# Altium PCB 遥控器.PcbDoc (part 1 of 2)
Units mil, origin at the board's own origin, x right, y up, seen from the top; angles counter-clockwise.
Board outline 3238.38 x 2687.2 mil, 2 copper layers (Top Layer, Bottom Layer); 70 components, 52 nets, 262 pads, 78 vias.
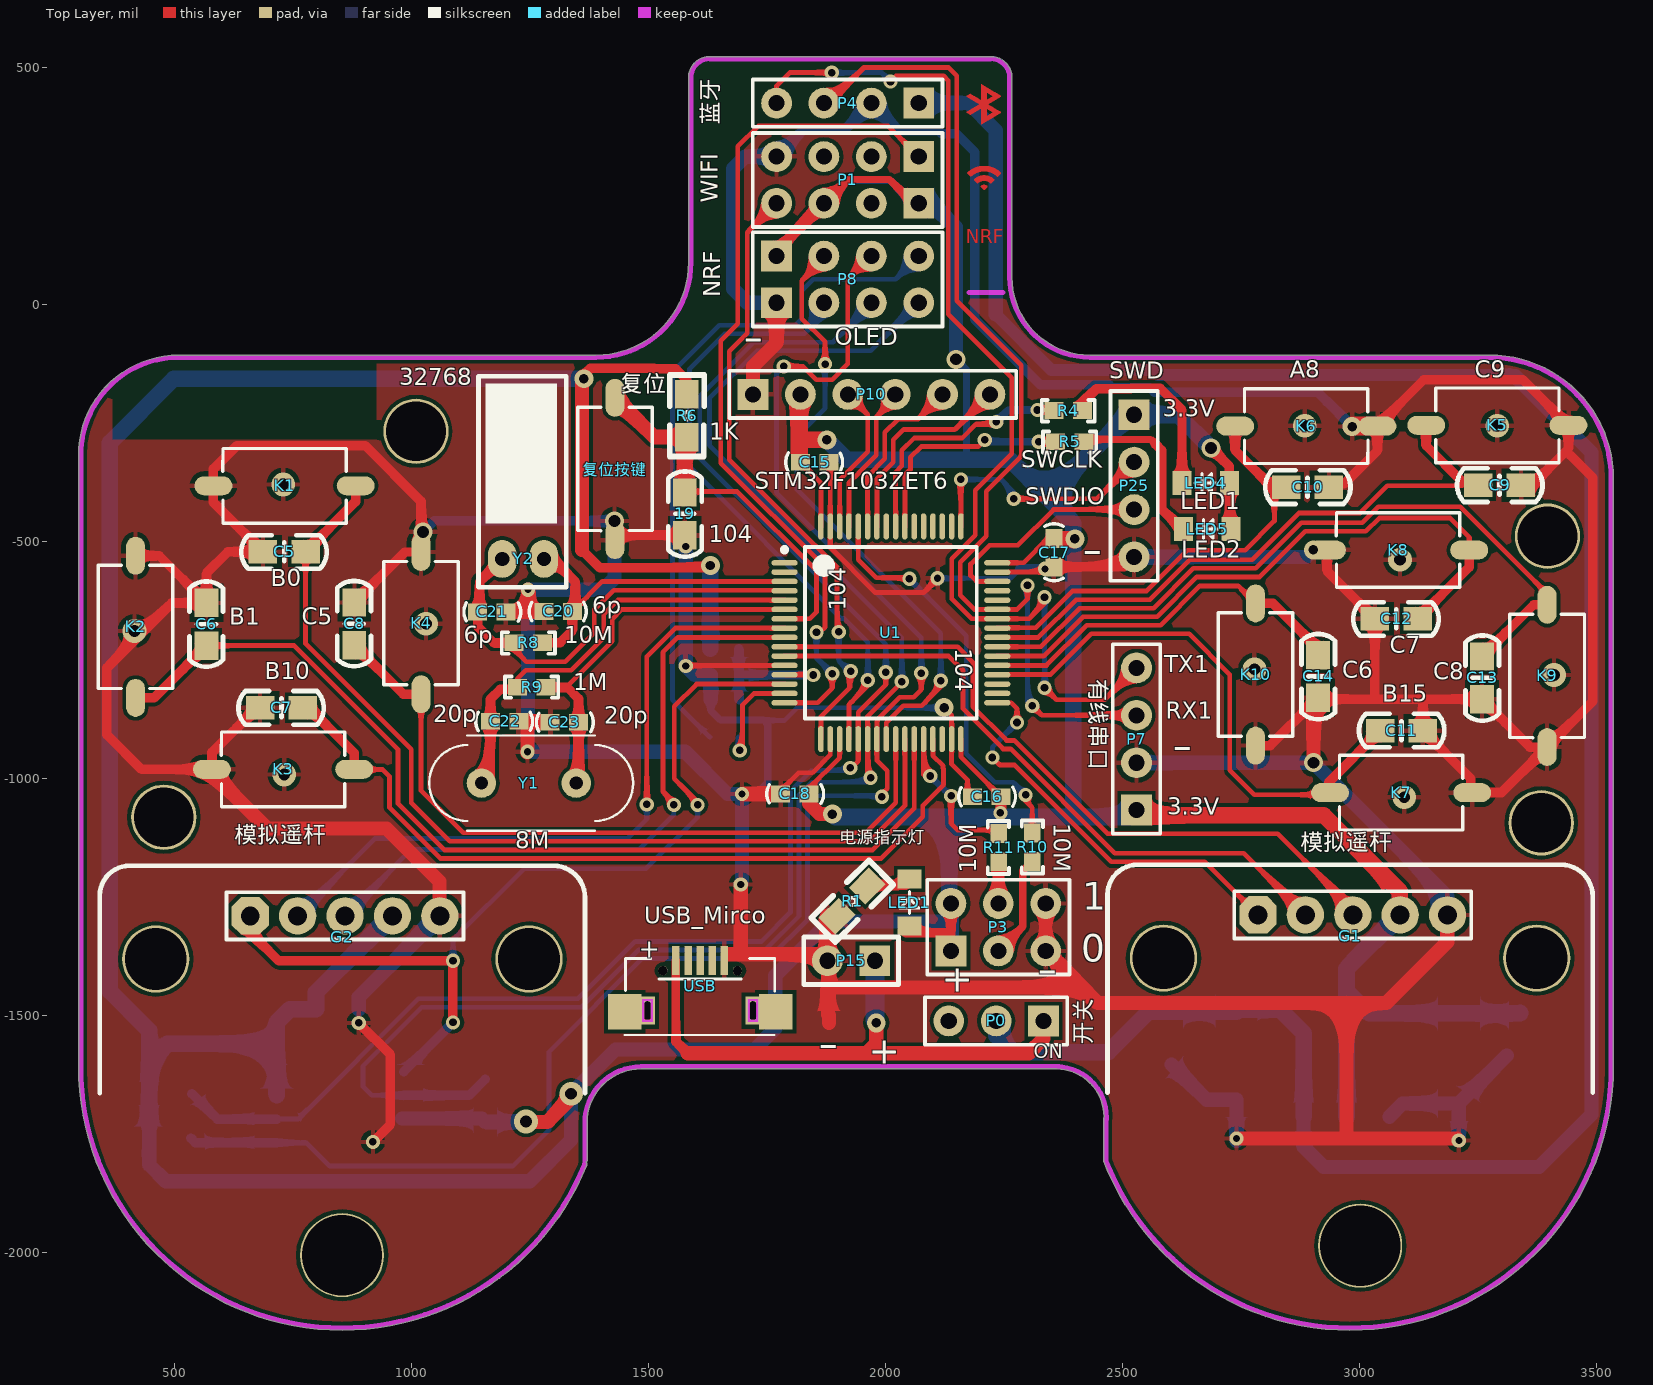
[diagram p0: Top Layer view]
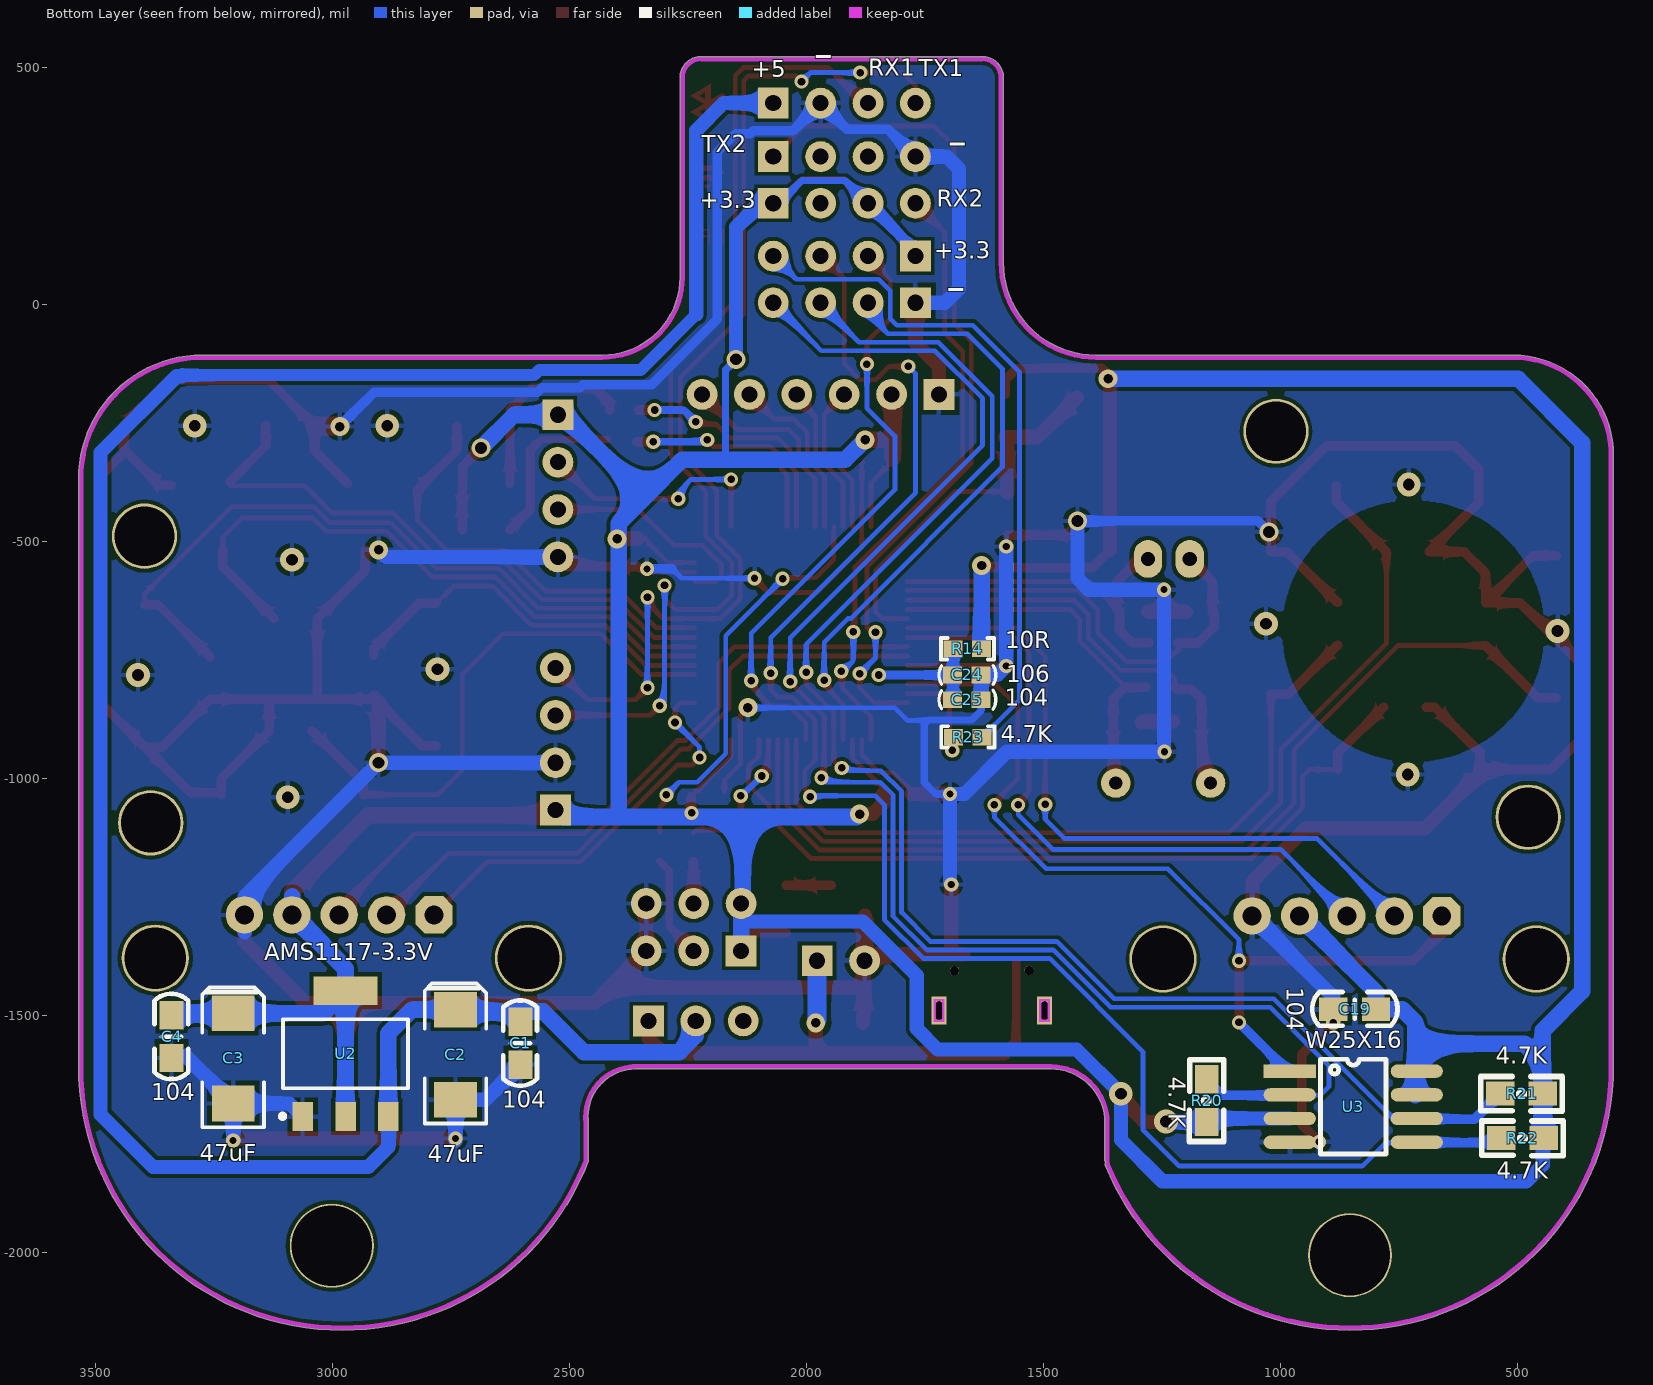
[diagram p1: Bottom Layer view, seen from below]

## Layer stack, top to bottom
Top Solder: solder mask 0.4, Solder Resist, Dk 3.5
Top Layer: signal copper 1.4
Dielectric 1: dielectric 12.6, FR-4, Dk 4.8
Bottom Layer: signal copper 1.4
Bottom Solder: solder mask 0.4, Solder Resist, Dk 3.5

## Board outline
853.17,-2164.35 ccw(c853.17,-1608.16) 1369.19,-1815.7 ccw(c1364.54,-1813.83) 1369.55,-1813.83 ccw(c1364.54,-1813.83) 1367.13,-1809.53 ccw(c1364.98,-1805.01) 1369.99,-1805.01 1369.99,-1726.27 cw(c1483.09,-1726.27) 1483.06,-1613.17 cw(c1483.09,-1726.27) 1483.09,-1613.17 2360.52,-1613.17 ccw(c2361.05,-1608.19) 2361,-1613.2 cw(c2359.85,-1713.85) 2460.51,-1713.85 cw(c2359.85,-1713.85) 2460.23,-1721.37 ccw(c2464.71,-1723.64) 2459.69,-1723.64 2459.69,-1806.02 ccw(c2464.71,-1806.02) 2460.03,-1807.82 ccw(c2979.15,-1608.16) 2979.15,-2164.35 ccw(c2979.15,-1608.16) 3535.35,-1608.16 ccw(c3530.33,-1608.16) 3535.35,-1608.13 3535.35,-368.6 ccw(c3273.83,-368.6) 3273.83,-107.08 2430.62,-107.08 cw(c2430.62,57.4) 2266.13,57.4 2266.13,478.46 ccw(c2221.75,478.46) 2221.75,522.84 1628.68,522.84 ccw(c1628.68,478.46) 1584.29,478.46 1584.29,88.07 cw(c1389.14,88.07) 1389.14,-107.08 508.45,-107.08 ccw(c508.45,-318.56) 296.97,-318.56 296.97,-1608.16 ccw(c853.17,-1608.16)

## Design rules (kind name [scope] priority, off if disabled: settings)
Clearance [All] p1: gap=8
ComponentClearance [All] p1: gap=0 collisioncheckmode=3 verticalgap=0 showdistances=FALSE
PolygonConnect [All] p1: connectstyle=Relief reliefconductorwidth=10 reliefentries=4 polygonreliefangle="90 Angle" airgapwidth=10
RoutingVias [All] p1: holewidth=28 width=50 viastyle="Through Hole" minholewidth=28 minwidth=50 maxholewidth=28 maxwidth=50
SolderMaskExpansion [All] p1: expansion=4
Width [All] p1: maxlimit=50 minlimit=10 preferedwidth=30
29 further rules are at their usual default settings.

## Components (designator, comment, footprint, x,y, rotation, side; value= is the part's Value field where it differs from the comment)
19 "104" 0805C 1576,-402 r270 top
C1 "104" 0805C 2603,-1599 r90 bottom
C2 "47uF" Cap1(47uF) 2740,-1488 r90 bottom
C3 "47uF" Cap1(47uF) 3209,-1496 r90 bottom
C4 "104" 0805C 3339,-1585 r90 bottom
C5 "" 0805C 771,-522 r180 top
C6 "" 0805C 567,-715 r90 top
C7 "" 0805C 765,-851 r180 top
C8 "" 0805C 879,-714 r90 top
C9 "" 0805C 3255,-382 r0 top
C10 "" 0805C 2850,-386 r0 top
C11 "" 0805C 3048.05,-899.5 r0 top
C12 "" 0805C 3116.94,-663.28 r180 top
C13 "" 0805C 3258,-748 r270 top
C14 "" 0805C 2912,-745 r270 top
C15 "104" 0603C 1783,-615 r180 top
C16 "104" 0603C 2279.79,-756.81 r0 top
C17 "" 0603C 2073,-457 r90 top
C18 "" 0603C 1875,-751 r0 top
C19 "104" 0805C 883,-1487 r180 bottom
C20 "6p" 0603C 1242,-930 r180 top
C21 "6p" 0603C 1236,-367 r0 top
C22 "20p" 0603C 1129,-1162 r180 top
C23 "20p" 0603C 1389,-600 r0 top
C24 "106" 0603C 1594,-500 r180 bottom
C25 "104" 0603C 1594,-552 r180 bottom
G1 "模拟遥杆" 模拟遥杆(半) 2586,-1367.37 r0 top locked
G2 "模拟遥杆" 模拟遥杆(半) 460,-1369.37 r0 top locked
K1 "" 贴片按键 876,-380 r180 top
K2 "" 贴片按键 420.09,-824.69 r90 top
K3 "" 贴片按键 872.85,-978.24 r180 top
K4 "" 贴片按键 1022.46,-816.82 r90 top
K5 "" 贴片按键 3146,-258 r0 top
K6 "" 贴片按键 2742.93,-259.73 r0 top
K7 "" 贴片按键 2943,-1033 r0 top
K8 "" 贴片按键 3225.21,-515.64 r180 top
K9 "" 贴片按键 3392.54,-639.65 r270 top
K10 "" 贴片按键 2777.38,-636.7 r270 top
LED1 "电源指示灯" 0805LED 2048,-1310 r90 top
LED4 "LED1" 0805LED 2723,-379 r180 top
LED5 "LED2" 0805LED 2726,-476 r180 top
P0 "开关" "Header 3" 2239,-1517 r180 top
P1 "WIFI" "Header 4X2" 1953.74,254.51 r270 top locked
P3 "" "Header 3X2" 2136,-1367 r90 top
P4 "蓝牙" "Header 4" 2070.59,425.51 r270 top
P7 "有线串口" "Header 4" 2530,-1068 r180 top
P8 "NRF" "Header 4X2" 1885.58,60.51 r90 top
P10 "OLED" "Header 6" 1722,-191 r90 top
P15 "" "Header 2" 1875,-1384 r270 top
P25 "SWD" "Header 4" 2523,-232 r0 top
R1 "" 0805R 1929,-1259 r45 top
R4 "" 0603R 2413,-225 r180 top
R5 "" 0603R 2416,-291 r180 top
R6 "1K" 0805R 1580,-235 r90 top
R8 "10M" 0603R 1274,-715 r180 top
R9 "1M" 0603R 1225,-807 r0 top
R10 "10M" 0603R 2310,-1117 r270 top
R11 "10M" 0603R 2237,-1174 r90 top
R14 "10R" 0603R 1688,-726 r180 bottom
R20 "4.7K" 0805R 1155,-1680 r270 bottom
R21 "4.7K" 0805R 491,-1665 r180 bottom
R22 "4.7K" 0805R 489,-1759 r180 bottom
R23 "4.7K" 0603R 1687,-912 r180 bottom
U1 "STM32F103ZET6" LQFP-64N 1871,-550 r0 top locked
U2 "AMS1117-3.3V" SOT-223 3059,-1715 r180 bottom
U3 "W25X16" W25X16 976,-1615 r180 bottom
USB "USB_Mirco" USB_Micro 1502,-1490 r0 top
Y1 "8M" 22M(晶振) 1147,-1010 r0 top
Y2 "32768" XTAL 1218,-541 r180 top
复位按键 "复位" 贴片按键 1426,-203 r270 top

## Footprints (in the part's own frame and the unit in brackets; to place one, negate y for a bottom-side part, rotate by r counter-clockwise, add the part's x,y. Pads: shape width x height; smd on the part's side, far side on the other; paste and mask are expansions set on the pad)
22M(晶振) [mil]
  round 62 hole 28: 1(0,0) 2(200,0)
  silkscreen extent -110,-100 320,100, body extent -114,-102 326,82, height 143
0603C [mil]
  rect 40x35 smd: 1(-97,-282) 2(-37,-282)
  silkscreen extent -126,-302 -6,-262, body extent -118,-302 -15,-263, height 35
0603R [mil]
  rect 40x35 smd: 1(-2,-1) 2(58,-1)
  silkscreen extent -28,-23 84,22, body extent -5,-17 61,15, height 22
0805C [mil]
  rect 60x50 smd: 1(-5,0) 2(85,0)
  silkscreen extent -50,-35 131,36, body extent -16,-26 102,29, height 37
0805LED [mil]
  rect 40x50 smd: 1(-2,-2) 2(98,-2)
  silkscreen extent 25,-22 71,18, body extent 7,-27 87,23, height 43
0805R [mil]
  rect 60x50 smd: 1(-45,0) 2(45,0)
  silkscreen extent -86,-37 86,36, body extent -38,-25 40,25, height 22
Cap1(47uF) [mil]
  rect 75x90 smd: 1(0,0) 2(-190,0)
  silkscreen extent -240,-65 55,65, body extent -213,-63 23,63, height 102
"Header 2" [mil]
  rect 65x65 hole 34: 1(0.81,102.01)
  round 65 hole 34: 2(0.81,2.01)
  silkscreen extent -49,-48 51,152, body extent -50,-50 50,150, height 336
"Header 3" [mil]
  rect 65x65 hole 34: 1(-94.03,-5.18)
  round 65 hole 34: 2(5.97,-5.18) 3(105.97,-5.18)
  silkscreen extent -144,-55 156,45, body extent -142,-59 158,41, height 336
"Header 3X2" [mil]
  rect 65x65 hole 34: 1(2.94,-1.52)
  round 65 hole 34: 2(102.94,-1.52) 3(2.94,-101.52) 4(102.94,-101.52) 5(2.94,-201.52) 6(102.94,-201.52)
  silkscreen extent -47,-252 153,48, body extent -42,-252 156,52, height 330
"Header 4" [mil]
  rect 65x65 hole 34: 1(0.95,-0.93)
  round 65 hole 34: 2(0.95,-100.93) 3(0.95,-200.93) 4(0.95,-300.93)
  silkscreen extent -49,-351 51,49, body extent -51,-354 49,46, height 336
"Header 4X2" [mil]
  rect 65x65 hole 34: 1(-57.12,115.92) 2(41.31,115.92)
  round 65 hole 34: 3(-57.12,15.92) 4(41.31,15.92) 5(-57.12,-84.08) 6(41.31,-84.08) 7(-57.12,-184.08) 8(41.31,-184.08)
  silkscreen extent -107,-234 91,166, body extent -109,-237 89,163, height 336
"Header 6" [mil]
  rect 65x65 hole 34: 1(0.95,2.02)
  round 65 hole 34: 2(0.95,-97.98) 3(0.95,-197.98) 4(0.95,-297.98) 5(0.95,-397.78) 6(0.95,-497.78)
  silkscreen extent -49,-553 51,52, body extent -48,-552 52,48, height 336
LQFP-64N [mm]
  oval 1.4x0.292 smd: 1(-2.146,0.12) 2(-2.146,-0.38) 3(-2.146,-0.88) 4(-2.146,-1.38) 5(-2.146,-1.88) 6(-2.146,-2.38) 7(-2.146,-2.88) 8(-2.146,-3.38) 9(-2.146,-3.88) 10(-2.146,-4.38) 11(-2.146,-4.88) 12(-2.146,-5.38) 13(-2.146,-5.88) 14(-2.146,-6.38) 15(-2.146,-6.88) 16(-2.146,-7.38) 33(9.254,-7.38) 34(9.254,-6.88) 35(9.254,-6.38) 36(9.254,-5.88) 37(9.254,-5.38) 38(9.254,-4.88) 39(9.254,-4.38) 40(9.254,-3.88) 41(9.254,-3.38) 42(9.254,-2.88) 43(9.254,-2.38) 44(9.254,-1.88) 45(9.254,-1.38) 46(9.254,-0.88) 47(9.254,-0.38) 48(9.254,0.12)
  oval 0.292x1.4 smd: 17(-0.196,-9.33) 18(0.304,-9.33) 19(0.804,-9.33) 20(1.304,-9.33) 21(1.804,-9.33) 22(2.304,-9.33) 23(2.804,-9.33) 24(3.304,-9.33) 25(3.804,-9.33) 26(4.304,-9.33) 27(4.804,-9.33) 28(5.304,-9.33) 29(5.804,-9.33) 30(6.304,-9.33) 31(6.804,-9.33) 32(7.304,-9.33) 49(7.304,2.07) 50(6.804,2.07) 51(6.304,2.07) 52(5.804,2.07) 53(5.304,2.07) 54(4.804,2.07) 55(4.304,2.07) 56(3.804,2.07) 57(3.304,2.07) 58(2.804,2.07) 59(2.304,2.07) 60(1.804,2.07) 61(1.304,2.07) 62(0.804,2.07) 63(0.304,2.07) 64(-0.196,2.07)
  silkscreen extent -2.27,-8.23 8.15,0.97, body extent -2.45,-9.63 9.55,2.37, height 1.6
SOT-223 [mm]
  rect 1.1x1.55 smd: 1(-0.09,0.029) 2(2.21,0.029) 3(4.51,0.029)
  rect 3.45x1.55 smd: 4(2.21,6.779)
  silkscreen extent -1.29,-0.07 5.56,5.25, body extent -1.09,-0.53 5.51,6.83, height 0.8
USB_Micro [mm]
  rect 0.4x1.55 smd: 1(1.405,2.692) 2(2.055,2.692) 3(2.705,2.692) 4(3.355,2.692) 5(4.005,2.692)
  rect 1.8x1.9 smd: 6(-1.345,-0.058) 6(6.755,-0.058)
  rect 0.8x1.5 hole 0.4 slot 1 at 90 deg: 6(-0.12,-0.008) 6(5.53,-0.008)
  round 0.5 hole 0.5 unplated: ""(0.705,2.142) ""(4.705,2.142)
  Keep-Out Layer lines w0.127: -0.349,-0.551 -0.349,0.567 0.109,0.567 0.109,-0.551 -0.349,-0.551 ; 5.301,-0.551 5.301,0.567 5.759,0.567 5.759,-0.551 5.301,-0.551
  silkscreen extent -1.34,-1.31 6.7,2.79, body extent -1.43,-2.78 6.77,3.35, height 2.63
W25X16 [mil]
  rect 110x28 smd: 1(-3.99,-2.77)
  oval 110x28 smd: 2(-3.99,-52.77) 3(-3.99,-102.77) 4(-3.99,-152.77) 5(264.01,-152.77) 6(264.01,-102.77) 7(264.01,-52.77) 8(264.01,-2.77)
  silkscreen extent 61,-178 199,22, body extent 8,-175 244,18, height 67
XTAL [mil]
  oval 60x80 hole 30: 1(-61,-4) 2(27,-4)
  silkscreen extent -108,-389 77,56, body extent -82,-72 54,54, height 365
模拟遥杆(半) [mm]
  round 3.6 hole 3.3: 0(0,-0.3) 0(20,-0.3)
  oct 2x2 hole 1.016: 1(5.063,2.014)
  round 2 hole 1.016: 2(7.603,2.014) 3(10.143,2.014) 4(12.683,2.014) 5(15.223,2.014)
  silkscreen extent -3,-7.5 23,4.7
贴片按键 [mil]
  oval 80x40 smd: 1(-5.71,2.8) 2(294.29,2.8)
  silkscreen extent 14,-76 274,82, body extent 24,-69 264,77, height 98

## Part data
19 C1 C4 C5 C6 C7 C8 C9 C10 C11 C12 C13 C14 C15 C16 C17 C18 C20 C21 C22 C23 C24 C25: library part C1
C2 C3: library part Cap1(100uF)
C19: library part C
G1 G2: library part 模拟遥感XY
K1 K2 K3 K4 K5 K6 K7 K8 K9 K10 复位按键: library part Key(两脚贴片)
LED1 LED4 LED5: library part LED
P0: library part "Header 3"
P1 P8: library part "Header 4X2"
P3: library part "Header 3X2"
P4 P7 P25: library part "Header 4"
P10: library part "Header 6"
P15: library part "Header 2"
R1 R4 R5 R6 R8 R9 R10 R11 R14 R20 R21 R22 R23: library part R1
U1: library part STM32F103R
U2: library part AMS1117-3.3V/5.0V
USB: library part USB_Micro
Y1 Y2: library part XTAL

## Free pads (board coordinates)
  round 137.8 hole 125.98: 0(477,-1082) 0(1009,-268) 0(3383,-1094) 0(3396,-489)
  round 177.17 hole 169.29: 0(3001,-1986) 1(853,-2006)

## Via types
v1: diameter 30, hole 16, Top Layer to Bottom Layer, 42 vias
v2: diameter 50, hole 25, Top Layer to Bottom Layer, 12 vias
v3: diameter 30, hole 15, Top Layer to Bottom Layer, 10 vias
v4: diameter 40, hole 20, Top Layer to Bottom Layer, 9 vias
v5: diameter 40, hole 25, Top Layer to Bottom Layer, 5 vias

## Nets (pads, with @x,y where several pads share a name; then routed paths per layer and width w, separated by ;. In a path a pad name is that pad's centre, name@x,y a point inside that pad or via, vN(x,y) a via of type N, cw(c..) or ccw(c..) an arc to the next point about the centre after c; other vN are vias at no path point)
3.3V: C3.1 C4.2 C15.2 C16.2 C17.2 C18.2 C19.2 G1.4 G2.4 LED1.1 LED4.1 LED5.1 P1.2 P1.6 P3.1 P3.2 P7.1 P8.2 P10.2 P25.1 R6.2 R14.2 R20.2 R21.2 R22.2 U1.19 U1.32 U1.48 U1.64 U2.2 U2.4 U3.3 U3.7 U3.8 | length 13771.3
  Top Layer w10: C15.2@1820,-333 1863.28,-376.28 U1.64@1863.28,-468.5 ; C18.2@1838,-1033 1838,-1021 1902.65,-956.35 U1.19@1902.65,-917.32 ; U1.32@2158.56,-917.32 2158.56,-954.56 2232.56,-1028.56 C16.2@2232.56,-1029.28 ; U1.48@2235.33,-545.28 2290.72,-545.28 2342,-494 C17.2@2355,-494 ; C17.2@2351.28,-485.28 C17.2@2354,-488
  Top Layer w15: P1.6@1869.66,213.2 1871.2,213.2 1921,263 2008,263 2057.8,213.2 P1.2@2069.66,213.2
  Top Layer w20: 1359,-518 1396.29,-555.29 1625.71,-555.29 v4(1630,-551) ; v4@1359,-153.09 1377,-135.09 1511.5,-135.09 1512.19,-135.78 1556.78,-135.78 1580,-159 R6.2@1580,-190 ; P8.2@1769.66,101.82 1769.66,113.2 P1.6@1869.66,213.2 ; LED1.1@2042,-1326 2134.52,-1326 2137.52,-1323 ; P3.1@2137.52,-1364.06 2137.52,-1323 ; P3.2@2137.52,-1264.06 2137.52,-1323 ; v1(2242,-1073) 2242.79,-1072.21 C16.2@2242.79,-1038.81 ; v5(2686,-303) 2725,-342 LED4.1@2725,-377 2726,-378 LED5.1@2726,-476
  Top Layer w30: v2(1241,-1724) 1242,-1725 1286,-1725 1336.27,-1674.73 v2(1336.27,-1665.45) ; 1359,-518 v4@1359,-153.09 ; C18.2@1838,-1033 1838,-1053 1860,-1075 1887,-1075 v4(1887.5,-1075.5) ; C17.2@2355,-494 2392,-494 v4@2396,-498
  Top Layer w35: C15.2@1817.28,-324.28 1817.28,-279 ; P10.2@1817.28,-189.88 1817.28,-279 ; v4(1876,-286) 1824.28,-286 1817.28,-279 ; v4@2396,-498 v4(2399,-495) ; P7.1@2529.05,-1067.07 2539.98,-1078 2924,-1078 3084.78,-1238.78 G1.4@3084.78,-1249.34
  Bottom Layer w15: P1.6@1869.66,213.2 1870.2,213.2 1918.2,261.2 2008.8,261.2 2056.8,213.2 P1.2@2069.66,213.2 ; v5(2148,-116) 2170,-138 2170,-323 2175,-328
  Bottom Layer w20: P8.2@1769.66,101.82 1769.66,113.2 P1.6@1869.66,213.2
  Bottom Layer w30: R22.2@446,-1735 446,-1815 481,-1850 1249,-1850 1336.27,-1762.73 v2(1336.27,-1665.45) 1429.72,-1572 1723,-1572 1767,-1528 1767,-1416 1881,-1302 2135.52,-1302 2137.52,-1304 ; U3.3@979.99,-1717.77 1147.77,-1717.77 R20.2@1155,-1725 1240,-1725 v2(1241,-1724) ; P1.2@2069.66,213.2 2097.8,213.2 2148,163 v5(2148,-116)
  Bottom Layer w35: R22.2@446,-1735 R21.2@446,-1665 446,-1598 ; U3.7@715.01,-1668.77 715.01,-1560 ; G2.4@959.33,-1290.08 798,-1451.41 C19.2@798,-1487 743,-1487 715.01,-1514.99 715.01,-1560 ; v4(1363,-157) 498,-157 363.1,-291.9 363.1,-1449.1 446,-1532 446,-1598 ; R14.2@1630,-727 v4(1630,-551) ; v4(1876,-286) 1918,-328 2175,-328 2262,-328 2339.5,-405.5 ; v4(1887.5,-1075.5) 1893.5,-1081.5 2134,-1081.5 ; P3.1@2137.52,-1364.06 2137.52,-1304 P3.2@2137.52,-1264.06 2134,-1260.53 2134,-1081.5 ; 2396,-1067.07 2396,-462 2339.5,-405.5 ; P7.1@2520.62,-1075.5 2514.62,-1081.5 2134,-1081.5 ; v5(2686,-303) 2615.93,-232.93 P25.1@2523.95,-232.93 2512.07,-232.93 2339.5,-405.5 ; U2.2@2972,-1713.87 U2.4@2972,-1448.13 ; G1.4@3084.13,-1286.87 3084.78,-1286.22 G1.4@3084.78,-1249.34 ; G1.4@3085.33,-1288.08 2972,-1401.41 U2.4@2972,-1448.13 ; C4.2@3339,-1495 3338,-1496 C3.1@3209,-1496 3019.87,-1496 U2.4@2972,-1448.13 ; 446,-1598 484,-1560 715.01,-1560
5.0V: C1.2 C2.1 P0.2 P4.1 U2.3 | length 5009.3
  Bottom Layer w25: 2232.16,-21.25 2349.45,-138.54 2563.15,-138.54 2574.04,-149.43 3315.76,-149.43
  Bottom Layer w30: P4.1@2069.66,424.56 2174.44,424.56 2232.16,366.84 2232.16,-21.25 ; U2.3@2881.45,-1713.87 2881.45,-1777.45 2924,-1820 3378,-1820 3489,-1709 3489,-312.56 3328,-151.56 3317.89,-151.56 3315.76,-149.43
  Bottom Layer w35: P0.2@2233.03,-1511.82 2233.03,-1542.69 2268,-1577.66 2469.34,-1577.66 2555,-1492 C2.1@2740,-1492 ; C2.1@2740,-1488 2832,-1488 2881.45,-1537.45 U2.3@2881.45,-1713.87
ADC4: G1.2 U1.11 | length 1361.2
  Top Layer w10: U1.11@1786.51,-742.13 2026.28,-742.13 2026.4,-742 2049.6,-742 2049.72,-742.13 2133.13,-742.13 2163,-772 2163,-853.46 2247.54,-938 2263.46,-938 2483.46,-1158 2755.25,-1158 G1.2@2877.13,-1279.87
ADC5: G1.3 U1.10 | length 1495.6
  Top Layer w10: U1.10@1786.51,-722.44 2151.44,-722.44 2184,-755 2184,-849 2255,-920 2270.91,-920 2467.91,-1117 2827,-1117 2985.33,-1275.33 G1.3@2985.33,-1288.08
ADC6: G2.3 U1.9 | length 1405.4
  Top Layer w10: v1@1550,-1059 1550,-1048 1530,-1028 1530,-734.46 1561.7,-702.76 U1.9@1786.51,-702.76
  Bottom Layer w10: G2.3@859.33,-1290.08 999.41,-1150 1480,-1150 1553,-1077 v1(1553,-1056)
ADC7: G2.2 U1.8 | length 1479.5
  Top Layer w10: v1(1496,-1055) 1496,-743 1555.93,-683.07 U1.8@1786.51,-683.07
  Bottom Layer w10: G2.2@759.33,-1290.08 922.41,-1127 1455,-1127 1496,-1086 v1(1496,-1055)
B12: G1.1 U1.33 | length 871
  Top Layer w10: v1(2225,-956) 2241,-972 2272,-972 2476,-1176 2673.25,-1176 G1.1@2785.33,-1288.08 ; U1.33@2235.33,-840.55 2264.55,-840.55 2277,-853 v1(2277,-882.22) v1@2277,-884
  Bottom Layer w10: v1(2225,-956) 2225,-934.22 v1(2277,-882.22)
BOOT0: R10.1 U1.60 | length 852.8
  Top Layer w10: U1.60@1942.02,-468.5 1942.02,-539.02 1980,-577 v1@2043,-577 ; v1(2295,-1035) 2295,-1048 2309,-1062 R10.1@2309,-1115
  Bottom Layer w10: v1(2050,-579) 2170,-699 2170,-948 2230.5,-1008.5 2268.5,-1008.5 v1(2295,-1035)
BOOT1: R11.2 U1.28 | length 318.7
  Top Layer w10: U1.28@2079.82,-917.32 2079.82,-991.82 2083,-995 v1(2094,-995) ; v1(2138,-1037) 2138,-1096 2151,-1109 2231,-1109 R11.2@2238,-1116
  Bottom Layer w10: v1(2094,-995) 2136,-1037 v1(2138,-1037)
GND: 19.2 C1.1 C2.2 C3.2 C4.1 C5.2 C6.2 C7.2 C8.2 C9.2 C10.2 C11.2 C12.2 C13.2 C14.2 C15.1 C16.1 C17.1 C18.1 C19.1 C20.2 C21.2 C22.1 C23.1 C24.2 C25.2 G1.5 G2.5 K1.2 K2.2 K3.2 K4.2 K5.2 K6.2 K7.2 K8.2 K9.2 K10.2 P1.7 P3.5 P3.6 P4.2 P7.2 P8.1 P10.1 P15.2 P25.4 R1.1 U1.12 U1.18 U1.31 U1.47 U1.63 U2.1 U3.4 USB.5 复位按键.2 | length 18846.4
  Top Layer w10: v3(1578,-763) 1579.19,-761.81 U1.12@1786.51,-761.81 ; C18.1@1778,-1033 1778,-1026 1816,-988 1845.54,-988 1882.97,-950.58 U1.18@1882.97,-917.32 ; C15.1@1880,-333 1882.97,-335.97 U1.63@1882.97,-468.5 1882.97,-512.97 1978,-608 2080,-608 2110,-578 v3@2110,-569 ; v4(2123,-851) 2138.87,-866.87 U1.31@2138.87,-917.32 2138.87,-969.87 2172.56,-1003.56 C16.1@2172.56,-1029.28 ; U1.47@2235.33,-564.96 2344.04,-564.96 C17.1@2355,-554
  Top Layer w20: K2.2@417.3,-530.4 467.4,-530.4 C6.2@567,-630 ; C7.2@692,-850 674,-850 578.56,-945.44 K3.2@578.56,-981.03 430.03,-981.03 357,-908 357,-767 494,-630 C6.2@567,-630 ; C8.2@879,-629 985.47,-522.53 K4.2@1019.66,-522.53 1019.66,-415.66 902,-298 631,-298 581.71,-347.29 K1.2@581.71,-382.8 581.71,-417.71 C5.2@686,-522 612,-522 567,-567 C6.2@567,-630 ; v1(888,-1516) 955,-1583 955,-1730 v1(918,-1767) ; 复位按键.2@1428.8,-497.29 1439.09,-487 19.2@1576,-487 ; P3.5@2337.52,-1364.06 P3.6@2337.52,-1264.06 ; C17.1@2355,-554 2502.88,-554 P25.4@2523.95,-532.93 ; K10.2@2780.17,-930.99 2811.01,-930.99 C14.2@2902.51,-839.49 ; C14.2@2912,-830 2915,-833 3028,-833 ; K8.2@2930.92,-518.43 2930.92,-562.25 C12.2@3031.94,-663.28 3031.94,-829.06 3028,-833 ; 2967,-379 3037.22,-308.78 K6.2@3037.22,-256.94 3135,-159.16 3135,-159 3344.09,-159 K5.2@3440.29,-255.2 3440.29,-304.71 3363,-382 C9.2@3340,-382 ; K7.2@3234.07,-1034.5 3234.07,-1000.52 C11.2@3133.05,-899.5 3133.05,-834.05 3132,-833 ; K7.2@3237.29,-1030.2 3299.07,-1030.2 K9.2@3395.33,-933.94 ; 3444.32,-318.32 3492,-366 3492,-837.28 K9.2@3395.33,-933.94 ; 3028,-833 3132,-833 ; 3132,-833 C13.2@3258,-833 3358.94,-933.94 K9.2@3395.33,-933.94
  Top Layer w30: K3.2@578.56,-981.03 578.56,-989.56 695,-1106 947,-1106 1058.8,-1217.8 1058.8,-1249.34 ; C21.2@1199,-649 1246,-649 ; C22.1@1226,-880 1290,-880 C23.1@1292,-882 ; v3@1243,-945 v3(1244,-944) C22.1@1244,-880 ; v3(1245,-602) 1246,-603 1246,-649 ; C20.2@1279,-648 1278,-649 1246,-649 ; 1668,-1371 1694,-1371 ; v3(1694,-1224) 1694,-1371 ; v3(1697,-1033) C18.1@1778,-1033 ; P10.1@1719.98,-190.05 1719.98,-131.02 1769.66,-81.34 P8.1@1769.66,3.39 ; R1.1@1876,-1290 1876,-1373 P15.2@1878,-1371 ; 1880.01,-1515.81 1880.01,-1500 1878,-1497.99 1878,-1428 ; P3.5@2337.52,-1364.06 2447.47,-1474 2972,-1474 ; 2414.47,-1441 1891,-1441 1878,-1428 ; v3(2740,-1760) 2979,-1760 ; v5(2902.51,-967.07) 2902.51,-839.49 C14.2@2912,-830 ; G1.5@3184.78,-1279 3184.78,-1345.22 3056,-1474 2972,-1474 ; v3(3209,-1764) 3205,-1760 2979,-1760 ; 1694,-1371 P15.2@1878,-1371 ; 1878,-1428 P15.2@1878,-1371 ; 2972,-1474 2972,-1753 2979,-1760
  Top Layer w40: v4(2984,-258) 2985.06,-256.94 K6.2@3037.22,-256.94
  Bottom Layer w10: 1725,-878 1786,-878 1813,-851 v4(2123,-851) ; v3(2109,-578) 2263,-578 2283,-558
  Bottom Layer w15: C25.2@1631,-834 1631,-857 1651,-877 1742,-877 1751,-886 1751,-1009 1727,-1033 v3(1697,-1033)
  Bottom Layer w20: v5(1024,-480) 1047,-457 v5(1428,-457) ; P1.7@1769.66,311.63 1827.03,369 1914.1,369 P4.2@1969.66,424.56 2028.22,366 2112,366 2118,360 2149,360 2188,321 2188,-31.67 2326.33,-170 2471.57,-170 2477.57,-176 2557.48,-176 2566.48,-185 2911,-185 v4(2984,-258) ; 2283,-558 v3(2336,-558) ; 2887.07,-532.93 v4(2902,-518)
  Bottom Layer w30: C19.1@888,-1487 888,-1461.41 G2.5@1059.33,-1290.08 ; v3(1244,-944) 1577,-944 1666,-1033 v3(1697,-1033) 1697,-1221 v3(1694,-1224) ; v3@1245,-942 v3(1245,-602) 1404,-602 1428,-578 v5(1428,-457) ; v3(1578,-511) v3(1578,-763) 1597,-782 C24.2@1631,-782 C25.2@1631,-834 ; P8.1@1769.66,3.39 1707.61,3.39 1678,33 1678,286 1703.63,311.63 P1.7@1769.66,311.63 ; P25.4@2523.95,-532.93 2887.07,-532.93 ; P7.2@2529.05,-967.07 v5(2902.51,-967.07) 3184.78,-1249.34 G1.5@3184.78,-1324.78 ; C1.1@2603,-1604 2677,-1678 C2.2@2740,-1678 v3(2740,-1760) v3@2740,-1765 ; U2.1@3062.55,-1713.87 3090.43,-1686 C3.2@3209,-1686 ; v3(3209,-1764) C3.2@3209,-1686 ; 3310,-1585 C3.2@3209,-1686
  other v2: 3094,-1040 731,-992 3410,-782 2778,-770 415,-689 1030,-674 3085,-539 729,-380 2884,-256 3290,-256
KEY1: C5.1 K1.1 U1.26 | length 2054.2
  Top Layer w10: C5.1@776,-522 776,-716 999,-939 999,-1052 1080,-1133 1965,-1133 2040.45,-1057.55 U1.26@2040.45,-917.32 ; C5.1@782.3,-539.7 C5.1@784,-538
  Top Layer w20: C5.1@776,-522 881.71,-416.29 K1.1@881.71,-382.8
KEY2: C6.1 K2.1 U1.27 | length 2116.2
  Top Layer w10: C6.1@567,-720 752,-720 971,-939 971,-1053 1069,-1151 1972.46,-1151 2060,-1063.46 2060,-1009 2060.13,-1008.87 U1.27@2060.13,-917.32
  Top Layer w20: K2.1@417.3,-830.4 456.6,-830.4 C6.1@567,-720
KEY3: C7.1 K3.1 U1.29 | length 1714.6
  Top Layer w10: K3.1@878.56,-981.03 878.56,-981.56 938.56,-981.56 953,-996 953,-1061.37 1060.63,-1169 1990,-1169 2078,-1081 2078,-1057.4 2122,-1013.4 2122,-979.58 2120.87,-978.46 2120.87,-973.87 2099.5,-952.5 U1.29@2099.5,-917.32
  Top Layer w20: C7.1@782,-850 878.56,-946.56 K3.1@878.56,-981.03
KEY4: C8.1 K4.1 U1.25 | length 1585.9
  Top Layer w10: K4.1@1019.66,-822.53 1019.66,-1026.21 1108.46,-1115 1957.54,-1115 2021,-1051.54 2021,-917.56 U1.25@2020.76,-917.32
  Top Layer w20: C8.1@879,-719 982.53,-822.53 K4.1@1019.66,-822.53
KEY5: C9.1 K5.1 U1.40 | length 1263.3
  Top Layer w10: U1.40@2235.33,-702.76 2321.7,-702.76 2401.46,-623 2557.46,-623 2641.46,-539 2773,-539 2872,-440 3001,-440 3058,-383 3216,-383
  Top Layer w20: K5.1@3140.29,-255.2 3140.29,-298.29 3216,-374
KEY6: C10.1 K6.1 U1.41 | length 912.7
  Top Layer w10: U1.41@2235.33,-683.07 2236.27,-682.14 2316.86,-682.14 2394,-605 2550,-605 2636,-519 2758,-519 2820,-457 C10.1@2820,-391.02
  Top Layer w20: K6.1@2737.22,-256.94 2737.22,-308.24 C10.1@2820,-391.02
KEY7: C11.1 K7.1 U1.36 | length 1174.1
  Top Layer w10: U1.36@2235.33,-781.5 2235.83,-781 2346.6,-781 2347.09,-781.5 2347.5,-781.5 2434,-695 2640,-695 2726,-781 2726,-983 2777.5,-1034.5 K7.1@2934.07,-1034.5
  Top Layer w20: K7.1@2934.07,-1034.5 2934.07,-1008.47 C11.1@3043.05,-899.5
KEY8: C12.1 K8.1 U1.38 | length 1350.2
  Top Layer w10: U1.38@2235.33,-742.13 2333.24,-742.13 2416.37,-659 2572.37,-659 2656.37,-575 2789,-575 2885,-479 3012.91,-479 3040.91,-451 3191,-451 3230.92,-490.92 K8.1@3230.92,-518.43
  Top Layer w20: C12.1@3121.94,-663.28 3230.92,-554.3 K8.1@3230.92,-518.43
KEY9: C13.1 K9.1 U1.39 | length 1558.5
  Top Layer w10: U1.39@2235.33,-722.44 2327.47,-722.44 2408.91,-641 2564.91,-641 2648.91,-557 2780.46,-557 2876.46,-461 3005.46,-461 3039.46,-427 3212,-427 3395.33,-610.33 K9.1@3395.33,-628.04
  Top Layer w20: C13.1@3258,-743 3367.06,-633.94 K9.1@3395.33,-633.94
KEY10: C14.1 K10.1 U1.37 | length 814.9
  Top Layer w10: U1.37@2235.33,-761.81 2339.01,-761.81 2423.82,-677 2579.82,-677 2662.82,-594 2743.18,-594 K10.1@2780.17,-630.99
  Top Layer w20: K10.1@2780.17,-630.99 2816.99,-630.99 2912,-726 C14.1@2912,-740
LED0: R5.2 U1.55 | length 481.3
  Top Layer w10: U1.55@2040.45,-468.5 2040.45,-359.83 2052,-348.28 2052,-323 2075,-300 2195,-300 v1(2209,-286)
  Top Layer w20: v1(2323,-290) R5.2@2358,-290
  Bottom Layer w15: v1(2209,-286) 2205,-290 v1(2323,-290)
LED1: R4.2 U1.56 | length 521.2
  Top Layer w10: U1.56@2020.76,-468.5 2020.76,-354.06 2034,-340.82 2034,-308 2060,-282 2161.4,-282 2190.4,-253 2228,-253 v1(2233,-248)
  Top Layer w20: v1(2320,-223) R4.2@2354,-223
  Bottom Layer w15: v1(2233,-248) 2258,-223 v1(2320,-223)
NetC24_1: C24.1 C25.1 R14.1 U1.13 | length 324.1
  Top Layer w10: U1.13@1786.51,-781.5 1846.5,-781.5 v1(1847,-782)
  Bottom Layer w20: R14.1@1690,-727 1690,-833 C25.1@1691,-834 ; C24.1@1691,-782 v1(1847,-782)
NetLED1_2: LED1.2 R1.2 | length 95
  Top Layer w20: R1.2@1947,-1226 LED1.2@2042,-1226
NetLED4_2: LED4.2 R4.1 | length 412.5
  Top Layer w20: R4.1@2415,-224 2415,-207 2444,-178 2517,-178 2518,-177 2579,-177 2625,-223 LED4.2@2625,-377
NetLED5_2: LED5.2 R5.1 | length 359.8
  Top Layer w15: R5.1@2418,-284.93 2558.93,-284.93 2569,-295
  Top Layer w20: 2569,-295 2582,-308 2582,-432 LED5.2@2626,-476
NetP0_1: P0.1 P15.1 USB.1 | length 1209.3
  Top Layer w18: 1557.31,-1555.31 USB.1@1557.31,-1384.02
  Top Layer w20: 1557.31,-1555.31 1582.16,-1580.16
  Top Layer w30: 1582.16,-1580.16 1959.84,-1580.16 ; v4(1980.01,-1515.81) 1980.01,-1559.99 1959.84,-1580.16 ; P0.1@2333.03,-1511.82 2333.03,-1548.97 2301.84,-1580.16 1959.84,-1580.16
  Bottom Layer w30: v4@1977.01,-1509.81 v4@1980.01,-1512.81
  Bottom Layer w40: v4@1977.01,-1509.81 P15.1@1977.01,-1384.81
NetP3_3: P3.3 R10.2 | length 218.7
  Top Layer w15: P3.3@2237.52,-1364.06 2289,-1312.58 2289,-1195 R10.2@2309,-1175
NetP3_4: P3.4 R11.1 | length 88.3
  Top Layer w20: P3.4@2237.52,-1264.06 2237.52,-1176.48 R11.1@2238,-1176
NetP8_8: P8.8 R23.2 | length 1458.4
  Bottom Layer w10: R23.2@1629,-913 1550,-834 1550,-143 1649,-44 1809,-44 1823,-30 1823,29 1847,53 2020.84,53 P8.8@2069.66,101.82
NRF_CE: P8.3 U1.20 | length 1313.5
  Top Layer w10: U1.20@1922.34,-917.32 1922.34,-844.66 1963,-804 1963,-794 v1(1962,-793)
  Bottom Layer w10: P8.3@1869.66,3.39 1869.66,-20.34 1828,-62 1660,-62 1586,-136 1586,-343 1906,-663 1912.6,-663 1962,-712.4 v1(1962,-793)
NRF_CS: P8.4 U1.24 | length 1287.7
  Top Layer w10: P8.4@1869.66,101.82 1869.66,96.66 1823,50 1823,-30 1872,-79 v1(1872,-126) ; U1.24@2001.08,-917.32 2001.08,-882.92 2037,-847 2076,-847 2116,-807 v1(2116,-794)
  Bottom Layer w10: v1@1872,-118 v1(1872,-126) 1872,-219 1814,-277 1813,-277 1813,-391 2116,-694 v1(2116,-794)
NRF_IRQ: R23.1 U1.15 | length 219.8
  Top Layer w10: v1@1698,-937 1698,-845 1722.13,-820.87 U1.15@1786.51,-820.87
  Bottom Layer w10: R23.1@1689,-913 1689,-938 v1(1692,-941)
OLED_D0: P10.3 U1.62 | length 320.4
  Top Layer w10: U1.62@1902.65,-468.5 1903,-468.16 1903,-370 1962,-311 1962,-232.07 P10.3@1919.98,-190.05
OLED_D1: P10.4 U1.61 | length 318.9
  Top Layer w10: U1.61@1922.34,-468.5 1922.34,-376.66 1943.71,-355.29 1943.71,-354.75 1980,-318.46 1980,-238 2019.98,-198.02 P10.4@2019.98,-190.05
OLED_DC: P10.6 U1.58 | length 440.4
  Top Layer w10: U1.58@1981.39,-468.5 1981.39,-367.97 2016,-333.37 2016,-286 2038,-264 2145.83,-264 P10.6@2219.78,-190.05
OLED_RES: P10.5 U1.59 | length 368.4
  Top Layer w10: U1.59@1961.71,-468.5 1961.71,-362.2 1998,-325.91 1998,-270 2026,-242 2067.83,-242 P10.5@2119.78,-190.05
OSC32IN: C20.1 R8.1 U1.3 Y2.1 | length 730.4
  Top Layer w10: C20.1@1339,-648 1345,-642 1402.35,-584.65 U1.3@1786.51,-584.65
  Top Layer w20: R8.1@1276,-714 1313,-714 1339,-688 C20.1@1339,-648 ; Y2.1@1279,-537 1297,-537 1345,-585 C20.1@1345,-642
OSC32OUT: C21.1 R8.2 U1.4 Y2.2 | length 941.3
  Top Layer w10: R8.2@1216,-714 1216,-728 1242,-754 1324,-754 1385,-693 1385,-644 1426,-603 1756.54,-603 1756.54,-603.4 1785.58,-603.4 U1.4@1786.51,-604.33
  Top Layer w20: C21.1@1139,-649 1139,-680 1173,-714 R8.2@1216,-714 ; C21.1@1143,-649 1143,-585 Y2.2@1191,-537
OSCIN: C22.2 R9.1 U1.5 Y1.1 | length 940.2
  Top Layer w10: R9.1@1223,-808 1223,-790 1241,-772 1336,-772 1405,-703 1405,-654 1434.98,-624.02 U1.5@1786.51,-624.02
  Top Layer w20: Y1.1@1147,-1019 1166,-1000 C22.2@1166,-880 1166,-833 1187,-812 1219,-812 R9.1@1223,-808
OSCOUT: C23.2 R9.2 U1.6 Y1.2 | length 824.3
  Top Layer w10: 1325.46,-808 1423,-710.46 1423,-664 1443.3,-643.7 U1.6@1786.51,-643.7
  Top Layer w20: R9.2@1283,-808 1325.46,-808 1328,-808 1352,-832 C23.2@1352,-882 1352,-1014 Y1.2@1347,-1019
RESET: 19.1 R6.1 U1.7 复位按键.1 | length 802.5
  Top Layer w10: 19.1@1585,-395 1686.54,-395 1854,-562.46 1854,-649 1839.61,-663.39 U1.7@1786.51,-663.39
  Top Layer w30: 复位按键.1@1428.8,-197.29 1511.5,-280 R6.1@1580,-280 1576,-284 19.1@1576,-397